# Altium PCB RJ45.PcbDoc
Units mil, origin at the board's own origin, x right, y up, seen from the top; angles counter-clockwise.
Board outline 6000 x 4000 mil, 2 copper layers (Top Layer, Bottom Layer); 41 components, 42 nets, 122 pads, 0 vias.
Unrouted connection lines stored in the file: 20.
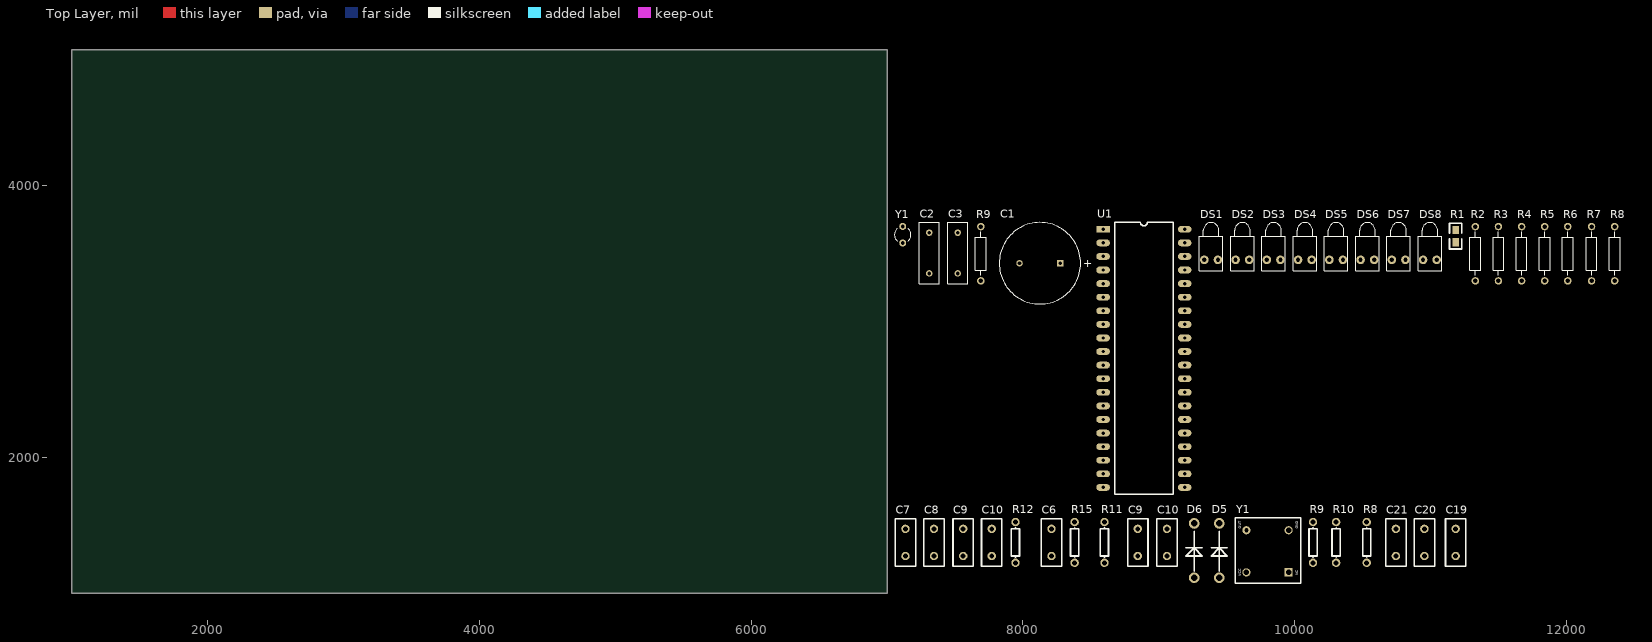
[diagram p0: Top Layer view]
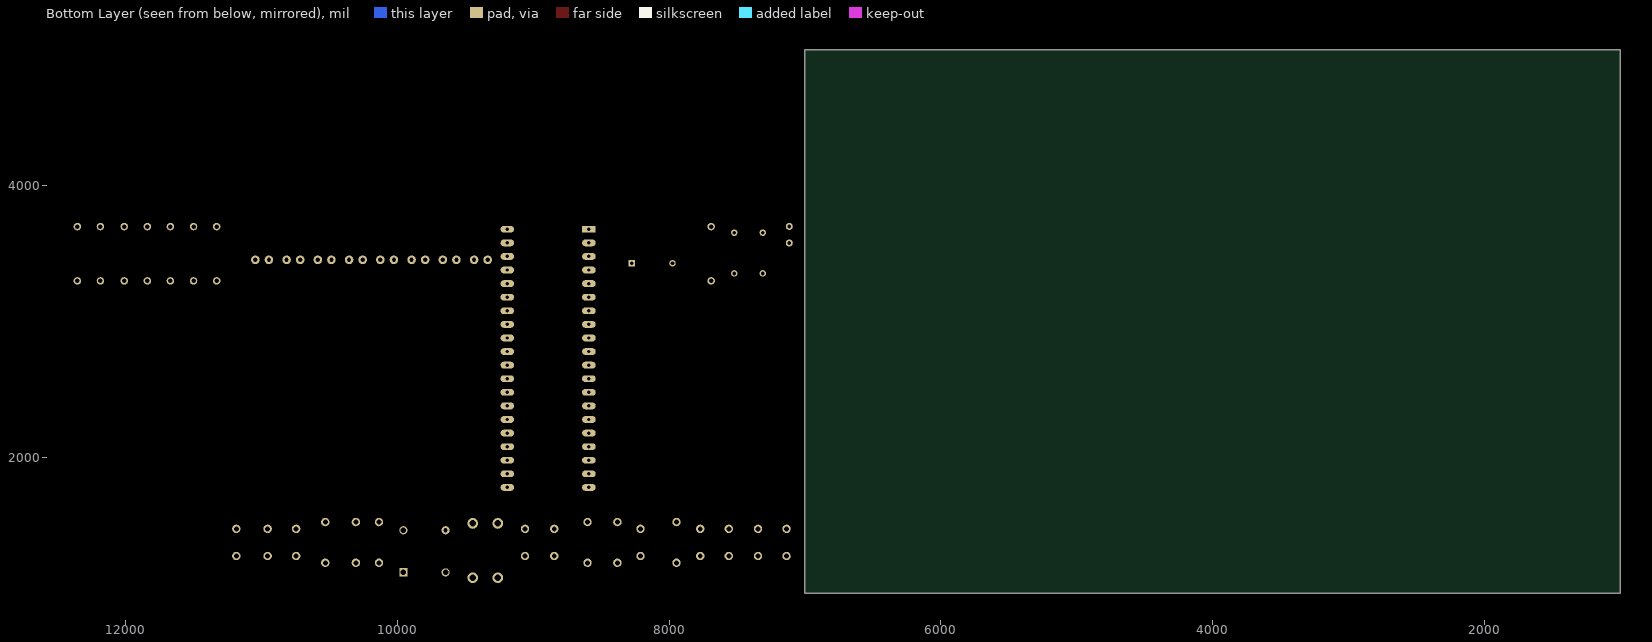
[diagram p1: Bottom Layer view, seen from below]

## Layer stack, top to bottom
Top Layer: signal copper 1.4
Dielectric: dielectric 12.6, FR-4, Dk 4.8
Bottom Layer: signal copper 1.4

## Board outline
1000,1000 7000,1000 7000,5000 1000,5000

## Design rules (kind name [scope] priority, off if disabled: settings)
Clearance [All] p1: gap=10
PolygonConnect [All] p1: connectstyle=Relief reliefconductorwidth=10 reliefentries=4 polygonreliefangle="90 Angle" airgapwidth=10
RoomDefinition Sheet2 [InComponentClass('Sheet2')] p1: confinementstyle=ConfineIn formatcopy=TRUE lockcomponents=FALSE outline 7045,1065 12440,1065 12440,3840 7045,3840
RoomDefinition CP2200 [InComponentClass('CP2200')] p2: confinementstyle=ConfineIn formatcopy=TRUE lockcomponents=FALSE outline 7045,1065 12440,1065 12440,3840 7045,3840
RoutingVias [All] p1: holewidth=28 width=50 viastyle="Through Hole" minholewidth=28 minwidth=50 maxholewidth=28 maxwidth=50
SolderMaskExpansion [All] p1: expansion=4
Width [All] p1: maxlimit=10 minlimit=10 preferedwidth=10
28 further rules are at their usual default settings.

## Classes and differential pairs
component class Sheet2: C1 C2 C3 DS1 DS2 DS3 DS4 DS5 DS6 DS7 DS8 R1 R2 R3 R4 R5 R6 R7 R8 R9 U1 Y1
component class CP2200: C6 C7 C8 C9 C10 C19 C20 C21 D2 D5 D6 J6 R8 R9 R10 R11 R12 R15 Y1

## Components (designator, comment, footprint, x,y, rotation, side; value= is the part's Value field where it differs from the comment)
C1 "Cap Pol1" RB7.6-15 8125,3430 r0 top
C2 "22pF" RAD-0.3 7310,3505 r90 top
C3 "22pF" RAD-0.3 7520,3505 r90 top
C6 "560P" RAD0.2 8210,1275 r90 top
C7 "0.01uF" RAD0.2 7135,1275 r90 top
C8 "0.01uF" RAD0.2 7345,1275 r90 top
C9 "22P" RAD0.2 8845,1275 r90 top
C9 "0.01uF" RAD0.2 7560,1275 r90 top
C10 "22P" RAD0.2 9060,1275 r90 top
C10 "0.01uF" RAD0.2 7770,1275 r90 top
C19 "10uF" RAD0.2 11185,1275 r90 top
C20 "10uF" RAD0.2 10955,1275 r90 top
C21 "10uF" RAD0.2 10745,1275 r90 top
D5 "" DIODE0.4 9445,1115 r90 top
D6 "" DIODE0.4 9260,1115 r90 top
DS1 "LED1" LED-1 9385,3455 r90 top
DS2 "LED1" LED-1 9615,3455 r90 top
DS3 "LED1" LED-1 9845,3455 r90 top
DS4 "LED1" LED-1 10075,3455 r90 top
DS5 "LED1" LED-1 10305,3455 r90 top
DS6 "LED1" LED-1 10535,3455 r90 top
DS7 "LED1" LED-1 10765,3455 r90 top
DS8 "LED1" LED-1 10995,3455 r90 top
R1 "220" 0805 11185,3585 r90 top
R2 "220" AXIAL-0.4 11330,3500 r90 top
R3 "220" AXIAL-0.4 11500,3500 r90 top
R4 "220" AXIAL-0.4 11670,3500 r90 top
R5 "220" AXIAL-0.4 11840,3500 r90 top
R6 "220" AXIAL-0.4 12010,3500 r90 top
R7 "220" AXIAL-0.4 12185,3500 r90 top
R8 "10M" AXIAL0.3 10530,1225 r90 top
R8 "220" AXIAL-0.4 12355,3500 r90 top
R9 "470" AXIAL0.3 10135,1225 r90 top
R9 "10k" AXIAL-0.4 7690,3500 r90 top
R10 "470" AXIAL0.3 10305,1225 r90 top
R11 "" AXIAL0.3 8600,1225 r90 top
R12 "8.2" AXIAL0.3 7945,1225 r90 top
R15 "" AXIAL0.3 8380,1225 r90 top
U1 "89C52" dip40 8590,3680 r0 top
Y1 "20M" XTAL1 9955,1155 r0 top
Y1 "XTAL" BCY-W2/D3.1 7115,3640 r0 top

## Footprints (in the part's own frame and the unit in brackets; to place one, negate y for a bottom-side part, rotate by r counter-clockwise, add the part's x,y. Pads: shape width x height; smd on the part's side, far side on the other; paste and mask are expansions set on the pad)
0805 [mil]
  rect 60x50 smd: 1(0,0) 2(90,0)
  silkscreen extent -50,-45 140,45
AXIAL0.3 [mil]
  round 62 hole 36: 1(0,0) 2(300,0)
  silkscreen extent 41,-30 259,30
AXIAL-0.4 [mm] "Axial Device, Thru-Hole; 2 Leads; 0.4 in Pin Spacing"
  round 1.4 hole 0.85: 1(-5.08,0) 2(5.08,0)
  silkscreen extent -4.06,-1.02 4.06,1.02
BCY-W2/D3.1 [mm] "Crystal, Thru-Hole; 2 Leads; Body 3.1 x 8.2 mm (Dia.xH)"
  round 1.3 hole 0.7: 1(0,1.55) 2(0,-1.55)
  silkscreen extent -1.55,-1.19 1.55,1.17
DIODE0.4 [mm]
  round 2 hole 1.2: 1(0,0) 2(10.16,0)
  silkscreen extent 1.27,-1.52 8.64,1.52
dip40 [mil]
  rect 100x50 hole 25: 1(0,0)
  oval 100x50 hole 25: 2(0,-100) 3(0,-200) 4(0,-300) 5(0,-400) 6(0,-500) 7(0,-600) 8(0,-700) 9(0,-800) 10(0,-900) 11(0,-1000) 12(0,-1100) 13(0,-1200) 14(0,-1300) 15(0,-1400) 16(0,-1500) 17(0,-1600) 18(0,-1700) 19(0,-1800) 20(0,-1900) 21(600,-1900) 22(600,-1800) 23(600,-1700) 24(600,-1600) 25(600,-1500) 26(600,-1400) 27(600,-1300) 28(600,-1200) 29(600,-1100) 30(600,-1000) 31(600,-900) 32(600,-800) 33(600,-700) 34(600,-600) 35(600,-500) 36(600,-400) 37(600,-300) 38(600,-200) 39(600,-100) 40(600,0)
  silkscreen extent 85,-1950 515,50
LED-1 [mm] "Typical RED GaAs LED; 2 Leads"
  round 1.6 hole 0.8: 1(0,1.27) 2(0,-1.27)
  silkscreen extent -2,-2.2 6.95,2.2
RAD0.2 [mil]
  round 62 hole 36: 1(0,0) 2(200,0)
  silkscreen extent -75,-75 275,75
RAD-0.3 [mm] "Radial Cap, Thru-Hole; 2 Leads; 0.3 in Pin Spacing"
  round 1.2 hole 0.7: 1(-3.81,0) 2(3.81,0)
  silkscreen extent -5.71,-1.91 5.71,1.91
RB7.6-15 [mm] "Polarized Capacitor (Radial); 2 Leads"
  rect 1.2x1.2 hole 0.7: 1(3.81,0)
  round 1.2 hole 0.7: 2(-3.81,0)
  silkscreen extent -7.62,-7.62 7.62,7.62
XTAL1 [mil]
  round 60 hole 40: 1(-310.08,-0.1) 3(-0.08,309.9)
  rect 60x60 hole 40: 2(0,0)
  round 60 hole 30: 4(-310.08,309.9)
  silkscreen extent -391,-80 89,400

## Part data
C1: "Polarized Capacitor (Radial)"
C2 C3: library part Cap, "Capacitor"
C6 C7 C8 C9 C9 C10 C10 C19 C20 C21: library part CAP, "Capacitor"
D5 D6: library part LED
DS1 DS2 DS3 DS4 DS5 DS6 DS7 DS8: "Typical RED GaAs LED"
R1 R2 R3 R4 R5 R6 R7 R8 R9: library part Res2, "Resistor"
R8 R9 R10 R11 R12 R15: library part RES2
U1: library part Component_1
Y1: library part CRYSTAL, "Crystal"
Y1: "Crystal Oscillator"

## Nets (pads, with @x,y where several pads share a name; then routed paths per layer and width w, separated by ;. In a path a pad name is that pad's centre, name@x,y a point inside that pad or via, vN(x,y) a via of type N, cw(c..) or ccw(c..) an arc to the next point about the centre after c; other vN are vias at no path point)
+3.3V: C19.1 C20.1 C21.1
A0: 
A1: 
A2: 
A3: 
A4: 
A5: 
A6: 
A7: 
D0: 
D1: 
D2: 
D3: 
D4: 
D5: 
D6: 
D7: 
GND: C7.2 C8.2 C9.2@8845,1475 C10.2@9060,1475 C19.2 C20.2 C21.2 U1.20
NetC6_1: C6.1 R15.2
NetC6_2: C6.2 R12.2
NetC7_1: C7.1
NetC8_1: C8.1
NetC9_1: C9.1@8845,1275
NetC10_1: C10.1@9060,1275
NetD2_2: R9.1@10135,1225
NetD2_3: R10.1
NetD2_6: R11.1
NetD2_7: R11.2
NetD2_9: R15.1
NetD2_10: R12.1
NetD5_A: R10.2
NetD6_A: R9.2@10135,1525
NetDS1_1: DS1.1 R1.2
NetDS2_1: DS2.1 R2.2
NetDS3_1: DS3.1 R3.2
NetDS4_1: DS4.1 R4.1
NetDS5_1: DS5.1 R5.1
NetDS6_1: DS6.1 R6.1
NetDS7_1: DS7.1 R7.1
NetDS8_1: DS8.1 R8.1@10530,1225
NetDS8_2: DS8.2 U1.1
VCC: C1.1
pads on no net: C1.2 C2.1 C2.2 C3.1 C3.2 C9.1@7560,1275 C9.2@7560,1475 C10.1@7770,1275 C10.2@7770,1475 D5.1 D5.2 D6.1 D6.2 DS1.2 DS2.2 DS3.2 DS4.2 DS5.2 DS6.2 DS7.2 R1.1 R2.1 R3.1 R4.2 R5.2 R6.2 R7.2 R8.1@12355,3300 R8.2 R9.1@7690,3300 R9.2@7690,3700 U1.2 U1.3 U1.4 U1.5 U1.6 U1.7 U1.8 U1.9 U1.10 U1.11 U1.12 U1.13 U1.14 U1.15 U1.16 U1.17 U1.18 U1.19 U1.21 U1.22 U1.23 U1.24 U1.25 U1.26 U1.27 U1.28 U1.29 U1.30 U1.31 U1.32 U1.33 U1.34 U1.35 U1.36 U1.37 U1.38 U1.39 U1.40 Y1.1 Y1.2 Y1.3 Y1.4

## Text inside footprints (layer, text, board x,y; h text height)
C1: Top Overlay "+" at 8445.15,3400.99 h59.06
Y1: Top Overlay "NC" at 10025,1135 h20 r90; Top Overlay "GND" at 10025,1475 h20 r90; Top Overlay "OUT" at 9605,1475 h20 r90; Top Overlay "VCC" at 9605,1125 h20 r90